# Altium PCB Gate Driver.PcbDoc (part 2 of 3)
Units mm, origin at the board's own origin, x right, y up, seen from the top; angles counter-clockwise.
Board outline 66.31 x 39.31 mm, 4 copper layers (L1 (Sig), L2 (-8V), L3 (POWER), L4 (Sig)), stack 0.603 mm thick; 125 components, 59 nets, 325 pads, 255 vias.
Unrouted connection lines stored in the file: 241.
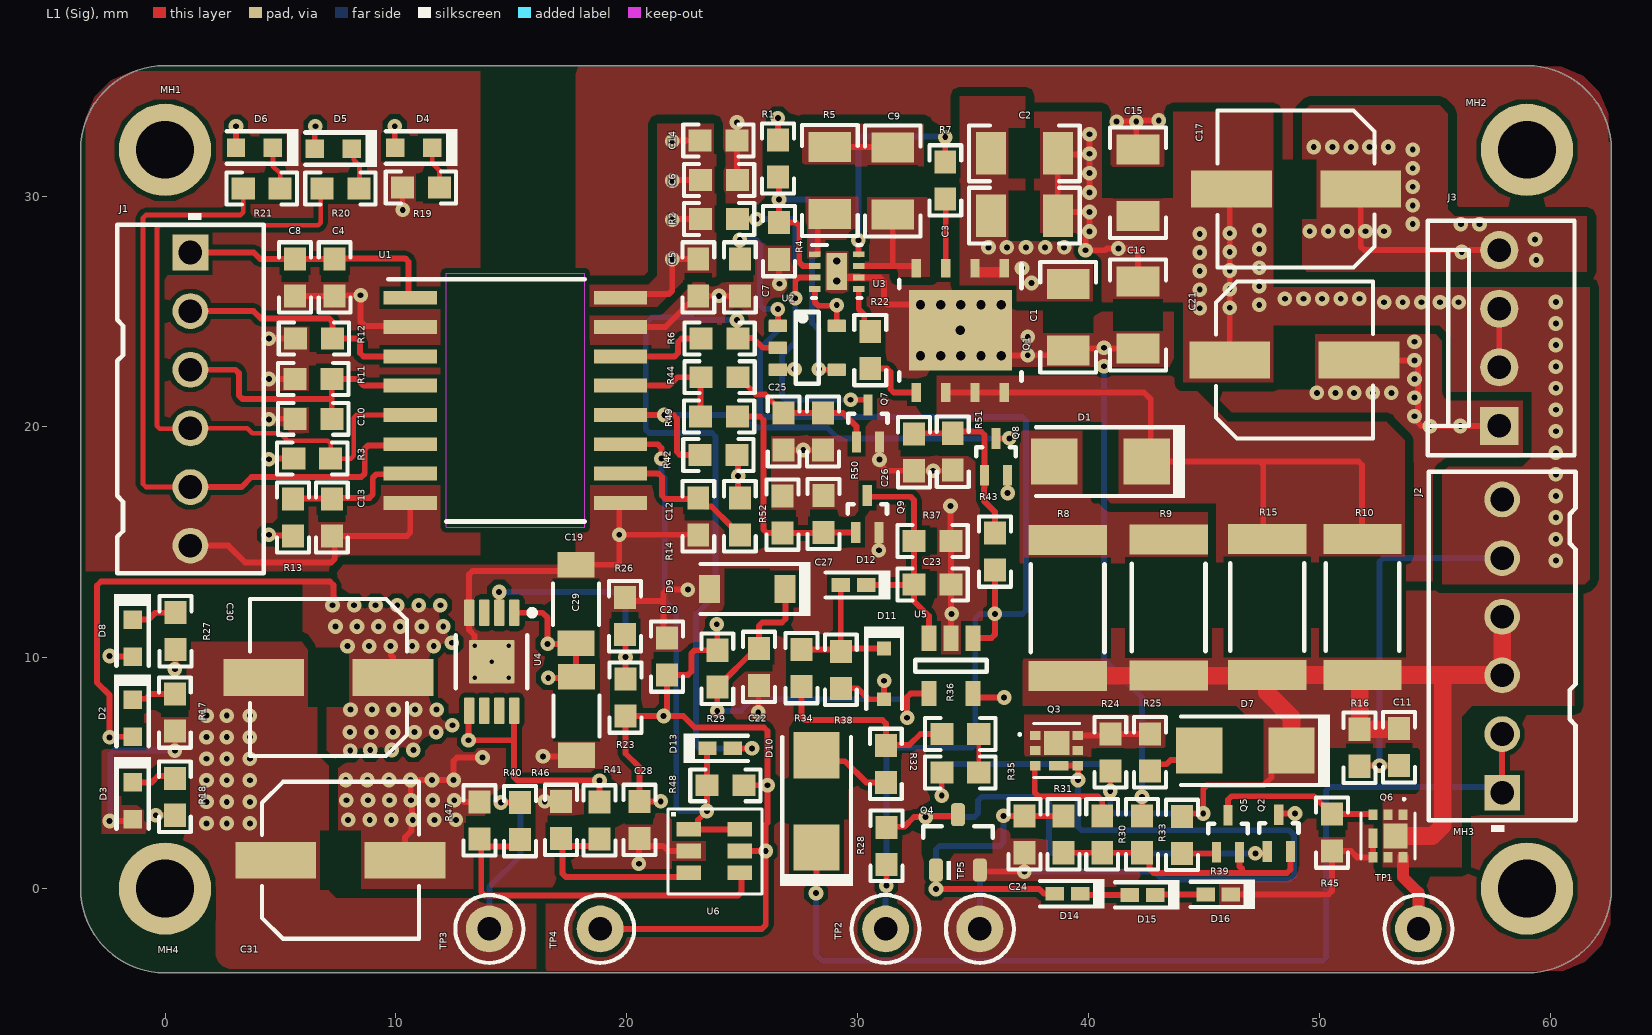
[diagram p0: L1 (Sig) view]

## Part data (continued)
R32: library part CRCW0603150RJNEA, "RES, 150, 5%, 0.1 W, 0603", Manufacturer=Vishay-Dale, Power_W=0.1, Supplier Part Number 1=541-150GCT-ND, TempCo="200 ppm/C", Tolerance_%=5, Value1=5%, Value2=0.1W, Value_Code=150R, ValueDisplayed=150, ComponentLink1Description="Datasheet link", ComponentLink1URL=http://www.vishay.com/docs/20035/dcrcwe3.pdf, CompType=Resistor, EIA_Code=E24, LatestRevisionDate=2015-06-13, MountType=SMT, PackageReference=0603, PartNumber=CRCW0603150RJNEA, Published=2008-06-26, Publisher="Texas Instruments", Res_ohm=150, RoHS=Y, Supplier 1=Digi-Key, Supplier 2=Mouser, Supplier 3=Farnell, Supplier Part Number 2=71-CRCW0603J-150-E3, Supplier Part Number 3=1514722, SymbolVersion=2009-05-29, Technology="Thick Film", U/M=EA, VDC_V=75, Simulation ModelName=Resistor, Simulation PortMap=(1:1),(2:2)
R34: library part RC0603JR-072K2L, "RES, 2.2 k, 5%, 0.1 W, 0603", Manufacturer="Yageo America", Power_W=0.1, Supplier Part Number 1=311-2.2KGRCT-ND, TempCo="100 ppm/C", Tolerance_%=5, Value1=5%, Value2=0.1W, Value_Code=2k20, ComponentLink1Description="Datasheet link", ComponentLink1URL=http://www.yageo.com/pdf/Pu-RC0603_51_PbFree_L_2.pdf, CompType=Resistor, EIA_Code=E24, LatestRevisionDate=2015-04-17, MountType=SMT, PackageReference=0603, PartNumber=RC0603JR-072K2L, Published=2008-06-26, Publisher="Texas Instruments", Res_ohm=2200, RoHS=Y, Supplier 1=Digi-Key, Supplier 2=Mouser, Supplier 3=Farnell, Supplier Part Number 2=603-RC0603JR-072K2L, Supplier Part Number 3=9233423, SymbolVersion=2009-05-29, Technology="Thick Film", U/M=EA, VDC_V=50, Simulation ModelName=Resistor, Simulation PortMap=(1:1),(2:2)
R37 R38: library part CRCW06031K80JNEA, "RES, 1.8 k, 5%, 0.1 W, 0603", Manufacturer=Vishay-Dale, Power_W=0.1, Supplier Part Number 1=541-1.8KGCT-ND, TempCo="200 ppm/C", Tolerance_%=5, Value1=5%, Value2=0.1W, Value_Code=1k80, ValueDisplayed=1.8k, ComponentLink1Description="Datasheet link", ComponentLink1URL=http://www.vishay.com/docs/20035/dcrcwe3.pdf, CompType=Resistor, EIA_Code=E24, LatestRevisionDate=2015-06-13, MountType=SMT, PackageReference=0603, PartNumber=CRCW06031K80JNEA, Published=2008-06-26, Publisher="Texas Instruments", Res_ohm=1800, RoHS=Y, Supplier 1=Digi-Key, Supplier 2=Mouser, Supplier 3=Farnell, Supplier Part Number 2=71-CRCW0603J-1.8K-E3, Supplier Part Number 3=1514705, SymbolVersion=2009-05-29, Technology="Thick Film", U/M=EA, VDC_V=75, Simulation ModelName=Resistor, Simulation PortMap=(1:1),(2:2)
R40 R41: library part RC0603FR-07220KL, "RES, 220 k, 1%, 0.1 W, 0603", Manufacturer="Yageo America", Power_W=0.1, Supplier Part Number 1=311-220KHRCT-ND, TempCo="200 ppm/C", Tolerance_%=1, Value1=1%, Value2=0.1W, Value_Code=220k, ComponentLink1Description="Datasheet link", ComponentLink1URL=http://www.yageo.com/pdf/Pu-RC0603_51_PbFree_L_2.pdf, CompType=Resistor, LatestRevisionDate=2015-04-17, MountType=SMT, PackageReference=0603, PartNumber=RC0603FR-07220KL, Published=2008-06-26, Publisher="Texas Instruments", Res_ohm=220000, RoHS=Y, Supplier 1=Digi-Key, Supplier 2=Mouser, Supplier 3=Farnell, Supplier Part Number 2=603-RC0603FR-07220KL, Supplier Part Number 3=9238760, SymbolVersion=2009-05-29, Technology="Thick Film", U/M=EA, VDC_V=150, Simulation ModelName=Resistor, Simulation PortMap=(1:1),(2:2)
R46: library part RC0603FR-074K12L, "RES, 4.12 k, 1%, 0.1 W, 0603", Manufacturer="Yageo America", Power_W=0.1, Supplier Part Number 1=311-4.12KHRCT-ND, TempCo="200 ppm/C", Tolerance_%=1, Value1=1%, Value2=0.1W, Value_Code=4k12, ComponentLink1Description="Datasheet link", ComponentLink1URL=http://www.yageo.com/pdf/Pu-RC0603_51_PbFree_L_2.pdf, CompType=Resistor, EIA_Code=E96, LatestRevisionDate=2015-04-17, MountType=SMT, PackageReference=0603, PartNumber=RC0603FR-074K12L, Published=2008-06-26, Publisher="Texas Instruments", Res_ohm=4120, RoHS=Y, Supplier 1=Digi-Key, Supplier 2=Mouser, Supplier 3=Farnell, Supplier Part Number 2=603-RC0603FR-074K12L, Supplier Part Number 3=9238565, SymbolVersion=2009-05-29, Technology="Thick Film", U/M=EA, VDC_V=150, Simulation ModelName=Resistor, Simulation PortMap=(1:1),(2:2)
R47: library part RC0603FR-079K76L, "RES, 9.76 k, 1%, 0.1 W, 0603", Manufacturer="Yageo America", Power_W=0.1, Supplier Part Number 1=311-9.76KHRCT-ND, TempCo="200 ppm/C", Tolerance_%=1, Value1=1%, Value2=0.1W, Value_Code=9k76, ComponentLink1Description="Datasheet link", ComponentLink1URL=http://www.yageo.com/pdf/Pu-RC0603_51_PbFree_L_2.pdf, CompType=Resistor, EIA_Code=E96, LatestRevisionDate=2015-04-17, MountType=SMT, PackageReference=0603, PartNumber=RC0603FR-079K76L, Published=2008-06-26, Publisher="Texas Instruments", Res_ohm=9760, RoHS=Y, Supplier 1=Digi-Key, Supplier 2=Mouser, Supplier Part Number 2=603-RC0603FR-079K76L, SymbolVersion=2009-05-29, Technology="Thick Film", U/M=EA, VDC_V=150, Simulation ModelName=Resistor, Simulation PortMap=(1:1),(2:2)
R50 R51 R52: library part RC0603JR-0715KL, "RES, 15 k, 5%, 0.1 W, 0603", Manufacturer="Yageo America", Power_W=0.1, Supplier Part Number 1=311-15KGRCT-ND, TempCo="100 ppm/C", Tolerance_%=5, Value1=5%, Value2=0.1W, Value_Code=15k0, ComponentLink1Description="Datasheet link", ComponentLink1URL=http://www.yageo.com/pdf/Pu-RC0603_51_PbFree_L_2.pdf, CompType=Resistor, EIA_Code=E24, LatestRevisionDate=2015-04-17, MountType=SMT, PackageReference=0603, PartNumber=RC0603JR-0715KL, Published=2008-06-26, Publisher="Texas Instruments", Res_ohm=15000, RoHS=Y, Supplier 1=Digi-Key, Supplier 2=Mouser, Supplier 3=Farnell, Supplier Part Number 2=603-RC0603JR-0715KL, Supplier Part Number 3=9233520, SymbolVersion=2009-05-29, Technology="Thick Film", U/M=EA, VDC_V=50, Simulation ModelName=Resistor, Simulation PortMap=(1:1),(2:2)
TP1 TP2 TP3 TP4 TP5: "Test Point, Miniature, Red, TH", Manufacturer=Keystone, Supplier Part Number 1=5000K-ND, ComponentLink1Description="Datasheet Link", ComponentLink1URL=http://www.keyelco.com/userAssets/file/M60-2p60.pdf, CompType="Test Point Loop", LatestRevisionDate=2014-11-22, MountType=TH, PackageReference="Red Miniature Testpoint", PartNumber=5000, Publisher="Texas Instruments", RoHS=Y, Supplier 1=Digi-Key, SymbolVersion=2008-04-04, U/M=EA
U1: "High-Performance, 8000 VPK Reinforced Quad Channel Digital Isolator, DW0016B", Alternate Manufacturer="Texas Instruments", Alternate PartNumber=ISO7842DW, ComponentLink1Description="Datasheet Link", ComponentLink1URL=http://www.ti.com/lit/ds/symlink/iso7842.pdf, CompType=IC, LatestRevisionDate=2015-04-24, Manufacturer="Texas Instruments", MountType=SMT, PackageReference=DW0016B, PartNumber=ISO7842DWR, Publisher="Texas Instruments", RoHS=Y, SymbolCreator=Altium, SymbolVerison=2014-12-19, U/M=EA
U2: "IC, Single Bus Buffer Gate With 3-States Outputs, OE  Active Low", Alternate Manufacturer=None, Manufacturer=TI, Area=19,500, ComponentHeight=0.043, ComponentLink1Description="AEO Datasheet Link", ComponentLink1URL=\\vette02\pmp_pcb\pcad_pdf's\sn74lvc1g125.pdf, PackageReference=DCK, PartNumber=SN74LVC1G125DCK, SymbolVersion="02/17/2009 08:57:26"
U3: "Synchronous Buck FET Driver Optimized for High-Frequency Applications, DSG0008A", Alternate Manufacturer="Texas Instruments", ComponentLink1Description="Datasheet Link", ComponentLink1URL=http://www.ti.com/lit/ds/symlink/tps51604.pdf, CompType=IC, LatestRevisionDate=2015-02-18, Manufacturer="Texas Instruments", MountType=SMT, PackageReference=DSG0008A, PartNumber=TPS51604DSG, Publisher="Texas Instruments", RoHS=Y, SymbolCreator=a0411947, SymbolVersion=2013-03-22, U/M=EA
U4: "Single Output LDO, 50 mA, Adjustable 1.175 to 26 V Output, 7 to 28 V Input, 8-pin MSOP (DGN), -40 to 125 degC, Green (RoHS & no Sb/Br)", Alternate Manufacturer=None, Alternate PartNumber=Equivalent, Manufacturer="Texas Instruments", Supplier Part Number 1=296-30185-2-ND, Accuracy(%)=1, Code_JEDEC=MO-187, ComponentLink1Description="Manufacturer URL", ComponentLink1URL=http://www.ti.com/, ComponentLink2Description=Datasheet, ComponentLink2URL=http://www.ti.com/general/docs/lit/getliterature.tsp?genericPartNumber=TPS7A4201&fileType=pdf, ComponentLink3Description="Package Specification", ComponentLink3URL=http://www.ti.com/litv/pdf/mpds046e, DatasheetVersion=SBVS184, Eco-Plan="Green (RoHS & no Sb/Br)", Iout(Max)(A)=0.05, Iq(Typ)(mA)=0.02, MountType=SMT, PackageDescription="8-Pin Plastic Small Outline, Body 3 x 3 mm, Pitch 0.65 mm", PackageReference=DGN0008B, PackageVersion=4073271/F, PartNumber=TPS7A4201DGNT, SubFamily="Single Channel LDO", Supplier 1=Digi-Key, Supplier 2=Digi-Key, Supplier 3=Digi-Key, Supplier 4=Farnell, Supplier 5=Newark, Supplier 6=Newark, Supplier 7=Mouser, Supplier Part Number 2=296-30185-1-ND, Supplier Part Number 3=296-30185-6-ND, Supplier Part Number 4=2078551, Supplier Part Number 5=82T9741, Supplier Part Number 6=76T8167, Supplier Part Number 7=595-TPS7A4201DGNT, Vdo(Typ)(mV)=290, Vin(Max)(V)=28, Vin(Min)(V)=7, Vout Adj(Max)(V)=26, Vout Adj(Min)(V)=1.161
U5: "40-ns, microPOWER, Push-Pull Output Comparators, DBV0005A", Alternate Manufacturer="Texas Instruments", ComponentLink1Description="Datasheet Link", ComponentLink1URL=http://www.ti.com/lit/ds/symlink/tlv3201.pdf, CompType=IC, LatestRevisionDate=2015-04-24, Manufacturer="Texas Instruments", MountType=SMT, PackageReference=DBV0005A, PartNumber=TLV3201DBV, Publisher="Texas Instruments", RoHS=Y, SymbolVersion=2008-11-25, U/M=EA
U6: "IC,  High Voltage, Over-Under Voltage Supervisory", Alternate Manufacturer=None, Manufacturer=TI, Area=23200, ComponentLink1Description="AEO Datasheet Link", ComponentLink1URL=\\vette02\pmp_pcb\pcad_pdf's\, PackageReference=SOT-23, PartNumber=TPS3700DDC, SymbolVersion="02/06/2012 14:38:27"

## Via types
v1: diameter 0.635, hole 0.254, L1 (Sig) to L4 (Sig), tented both sides, 248 vias
v2: diameter 0.5, hole 0.2, L1 (Sig) to L4 (Sig), tented both sides, 5 vias
v3: diameter 0.61, hole 0.305, L1 (Sig) to L4 (Sig), 2 vias